# EAGLE board barebones_arduino2 (EAGLE 5.06)
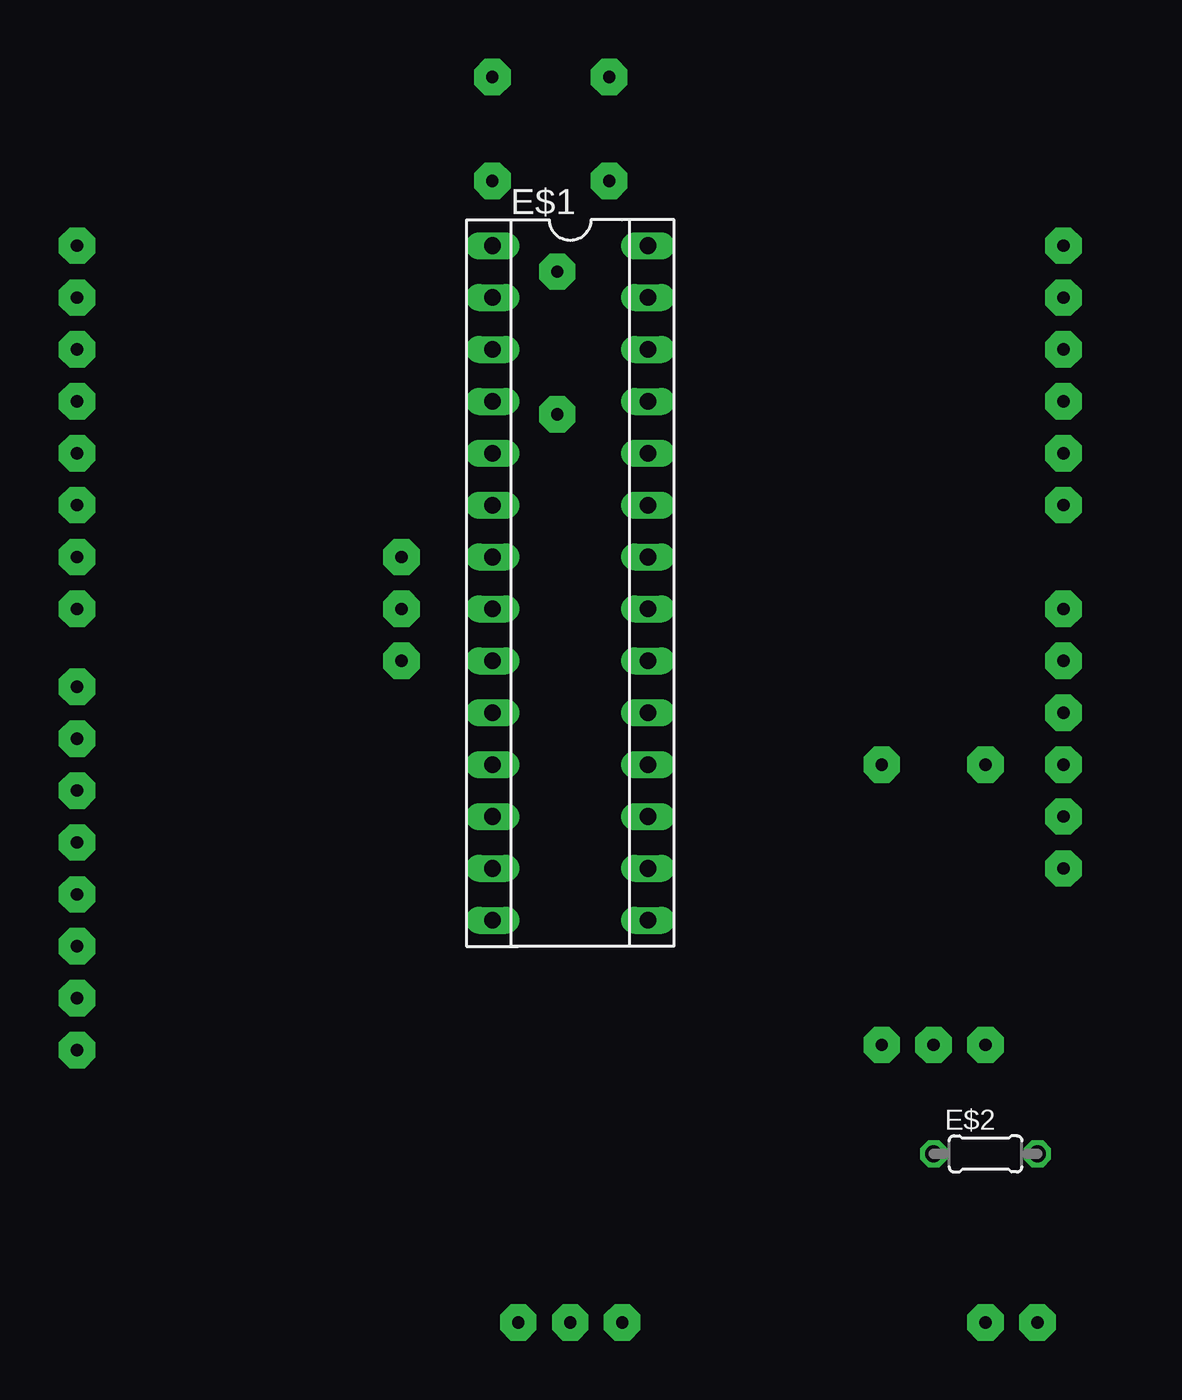
[diagram p0: board, top side]
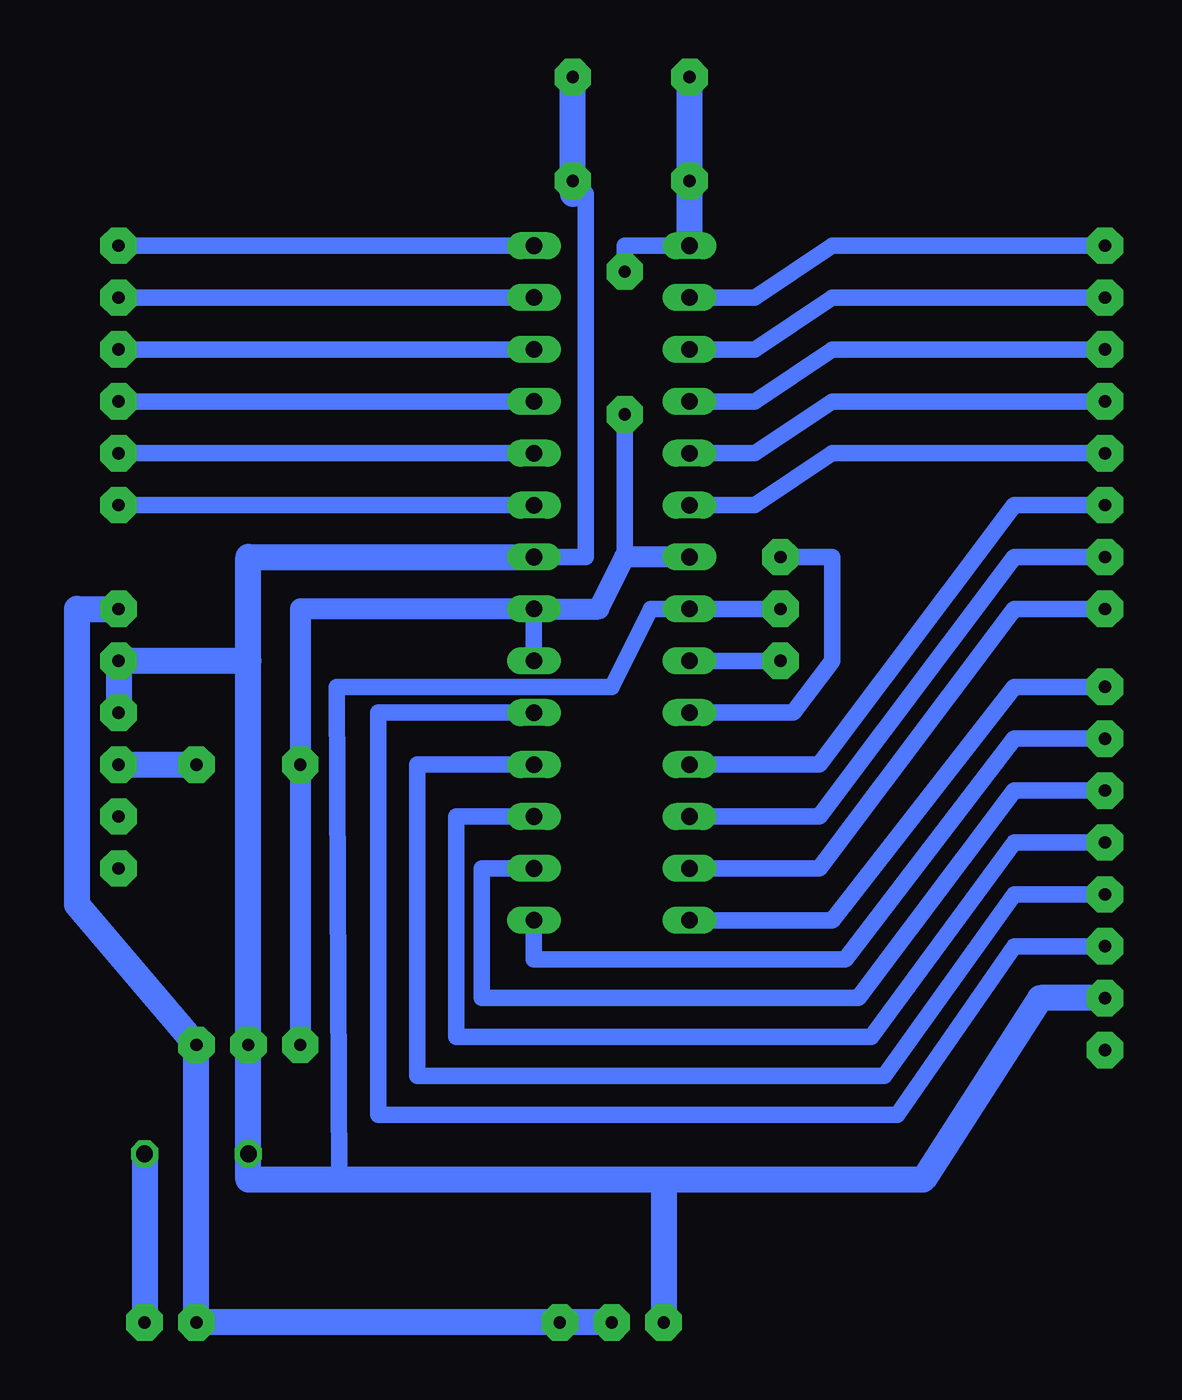
[diagram p1: board, bottom side, seen from below]

No outline drawn. Coordinates in mm, seen from the top.
Copper layers (1*16): Top 0.035mm / dielectric 1.5mm / Bottom 0.035mm
Design rules "default": minimum track width 10mil, minimum drill 24mil, track to track 8mil, track to pad 8mil, pad to pad 8mil, via to via 8mil, smd to smd 8mil, copper to edge 40mil, drill to drill 8mil, minimum pad ring 10mil, minimum via ring 8mil, stop-mask expansion 4mil, vias tented up to drill 0mil, thermal gap 10mil

## Footprints (pad centres in the part's own frame; a part is rotated, then mirrored left to right if it is on the bottom)
SOCKET-28-3 = drill 0.813 long: 1 -16.51,-3.81; 2 -13.97,-3.81; 3 -11.43,-3.81; 4 -8.89,-3.81; 5 -6.35,-3.81; 6 -3.81,-3.81; 7 -1.27,-3.81; 8 1.27,-3.81; 9 3.81,-3.81; 10 6.35,-3.81; 11 8.89,-3.81; 12 11.43,-3.81; 13 13.97,-3.81; 14 16.51,-3.81; 15 16.51,3.81; 16 13.97,3.81; 17 11.43,3.81; 18 8.89,3.81; 19 6.35,3.81; 20 3.81,3.81; 21 1.27,3.81; 22 -1.27,3.81; 23 -3.81,3.81; 24 -6.35,3.81; 25 -8.89,3.81; 26 -11.43,3.81; 27 -13.97,3.81; 28 -16.51,3.81
0204/5 = drill 0.813 octagon: 1 -2.54,0; 2 2.54,0

## Placement (x,y rotation side)
E$1  [SOCKET-28-3]  30.48,37.47 270 top
E$2  [0204/5]  50.8,9.53 0 top

## Library data of the parts
E$1 = ic-package
E$2 = rcl

## Nets
DP0: E$1.2
DP1: E$1.3
DP2: E$1.4
DP3: E$1.5
DP4: E$1.6
GND: E$1.22
S$1: E$1.11
S$2: E$1.12
S$3: E$1.13
S$4: E$1.14
S$7: E$1.15
S$8: E$1.28
S$9: E$1.25
S$10: E$1.26
S$11: E$1.27
S$12: E$1.24
S$13: E$1.23
S$14: E$2.2
S$16: E$1.8
S$20: E$1.1
S$29: E$1.16
S$30: E$1.17
S$31: E$1.18
S$32: E$1.19
VCC: E$1.7 E$1.20 E$1.21
XTAL1: E$1.9
XTAL2: E$1.10

## Tracks (layer width: path | path; a pad name or v marks a point on that pad's centre or on a via)
DP0  (via drill 0.6 pad 1.78)
  Bottom 0.813: E$1.2 23.5,51.44 19.68,53.98 v6.35,53.98
DP1  (via drill 0.6 pad 1.78)
  Bottom 0.813: E$1.3 23.5,48.9 19.68,51.44 v6.35,51.44
DP2  (via drill 0.6 pad 1.78)
  Bottom 0.813: E$1.4 23.5,46.35 19.68,48.9 v6.35,48.9
DP3  (via drill 0.6 pad 1.78)
  Bottom 0.813: E$1.5 23.5,43.81 19.68,46.35 v6.35,46.35
DP4  (via drill 0.6 pad 1.78)
  Bottom 0.813: E$1.6 23.5,41.27 19.68,43.81 v6.35,43.81
GND  (via drill 0.6 pad 1.78)
  Bottom 0.406: 31.75,56.52 32.38,56.52
  Bottom 0.813: 31.75,56.52 31.75,38.73 E$1.22
  Bottom 1.27: 32.38,56.52 v32.38,62.23 | v54.61,31.11 54.61,33.66 48.26,33.66 | E$1.22 48.26,38.73 48.26,33.66 | 48.26,33.66 v48.26,14.86 48.26,8.26 27.94,8.26 | 27.94,8.26 v27.94,1.27 | 27.94,8.26 15.24,8.26 9.53,17.14 v6.35,17.14
S$1  (via drill 0.6 pad 1.78)
  Bottom 0.813: E$1.11 20.32,28.57 10.79,41.27 v6.35,41.27
S$2  (via drill 0.6 pad 1.78)
  Bottom 0.813: E$1.12 20.32,26.04 10.79,38.73 v6.35,38.73
S$3  (via drill 0.6 pad 1.78)
  Bottom 0.813: E$1.13 20.32,23.5 10.79,36.2 v6.35,36.2
S$4  (via drill 0.6 pad 1.78)
  Bottom 0.813: E$1.14 19.68,20.95 10.79,32.38 v6.35,32.38
S$5  (via drill 0.6 pad 1.78)
  other vias: 26.67,57.15
S$6  (via drill 0.6 pad 1.78)
  other vias: 32.38,57.15
S$7  (via drill 0.6 pad 1.78)
  Bottom 0.813: E$1.15 34.29,19.05 19.05,19.05 10.79,29.84 v6.35,29.84
S$8  (via drill 0.6 pad 1.78)
  Bottom 0.813: E$1.28 v54.61,53.98
S$9  (via drill 0.6 pad 1.78)
  Bottom 0.813: E$1.25 v54.61,46.35
S$10  (via drill 0.6 pad 1.78)
  Bottom 0.813: E$1.26 v54.61,48.9
S$11  (via drill 0.6 pad 1.78)
  Bottom 0.813: E$1.27 v54.61,51.44
S$12  (via drill 0.6 pad 1.78)
  Bottom 0.813: E$1.24 v54.61,43.81
S$13  (via drill 0.6 pad 1.78)
  Bottom 0.813: E$1.23 v54.61,41.27
S$14  (via drill 0.6 pad 1.78)
  Bottom 1.27: E$2.2 v53.34,1.27
S$15  (via drill 0.6 pad 1.78)
  other vias: 54.61,33.66
S$16  (via drill 0.6 pad 1.78)
  Bottom 0.813: v22.23,36.2 E$1.8 28.57,36.2 30.48,32.38 43.94,32.38 43.81,8.13 48.13,8.13
S$17  (via drill 0.6 pad 1.78)
  Bottom 1.27: v54.61,28.57 v50.8,28.57
S$18  (via drill 0.6 pad 1.78)
  other vias: 54.61,26.04
S$19  (via drill 0.6 pad 1.78)
  other vias: 54.61,23.5
S$20  (via drill 0.6 pad 1.78)
  Bottom 0.813: v29.84,52.7 29.84,53.98 E$1.1
  Bottom 1.27: E$1.1 v26.67,62.23
S$21  (via drill 0.6 pad 1.78)
  Bottom 0.406: v30.48,1.27 v33.02,1.27
  Bottom 1.27: v54.61,36.2 56.64,36.2 56.64,21.72 v50.8,14.86 v50.8,1.27 v30.48,1.27
S$28  (via drill 0.6 pad 1.78)
  other vias: 6.35,14.61
S$29  (via drill 0.6 pad 1.78)
  Bottom 0.813: E$1.16 36.83,23.5 36.83,17.14 18.41,17.14 10.79,27.3 v6.35,27.3
S$30  (via drill 0.6 pad 1.78)
  Bottom 0.813: E$1.17 38.1,26.04 38.1,15.24 17.78,15.24 10.79,24.77 v6.35,24.77
S$31  (via drill 0.6 pad 1.78)
  Bottom 0.813: E$1.18 40.01,28.57 40.01,13.34 17.14,13.34 10.79,22.23 v6.35,22.23
S$32  (via drill 0.6 pad 1.78)
  Bottom 0.813: E$1.19 41.91,31.11 41.91,11.43 16.51,11.43 10.79,19.68 v6.35,19.68
VCC  (via drill 0.6 pad 1.78)
  Bottom 0.813: 29.84,38.73 v29.84,45.72 | E$1.20 E$1.21 E$1.20
  Bottom 1.016: v45.72,14.86 v45.72,28.57 45.72,36.2 E$1.21 31.11,36.2 29.84,38.73 E$1.7
XTAL1  (via drill 0.6 pad 1.78)
  Bottom 0.813: v22.23,33.66 E$1.9
XTAL2  (via drill 0.6 pad 1.78)
  Bottom 0.813: E$1.10 21.59,31.11 19.68,33.66 19.68,38.73 v22.23,38.73